# Altium PCB PCB2.PcbDoc (part 2 of 2)
Units mm, origin at the board's own origin, x right, y up, seen from the top; angles counter-clockwise.
Board outline 90.3 x 60.42 mm, 2 copper layers (Layer1, Layer4), stack 0.325 mm thick; 123 components, 111 nets, 492 pads, 352 vias.
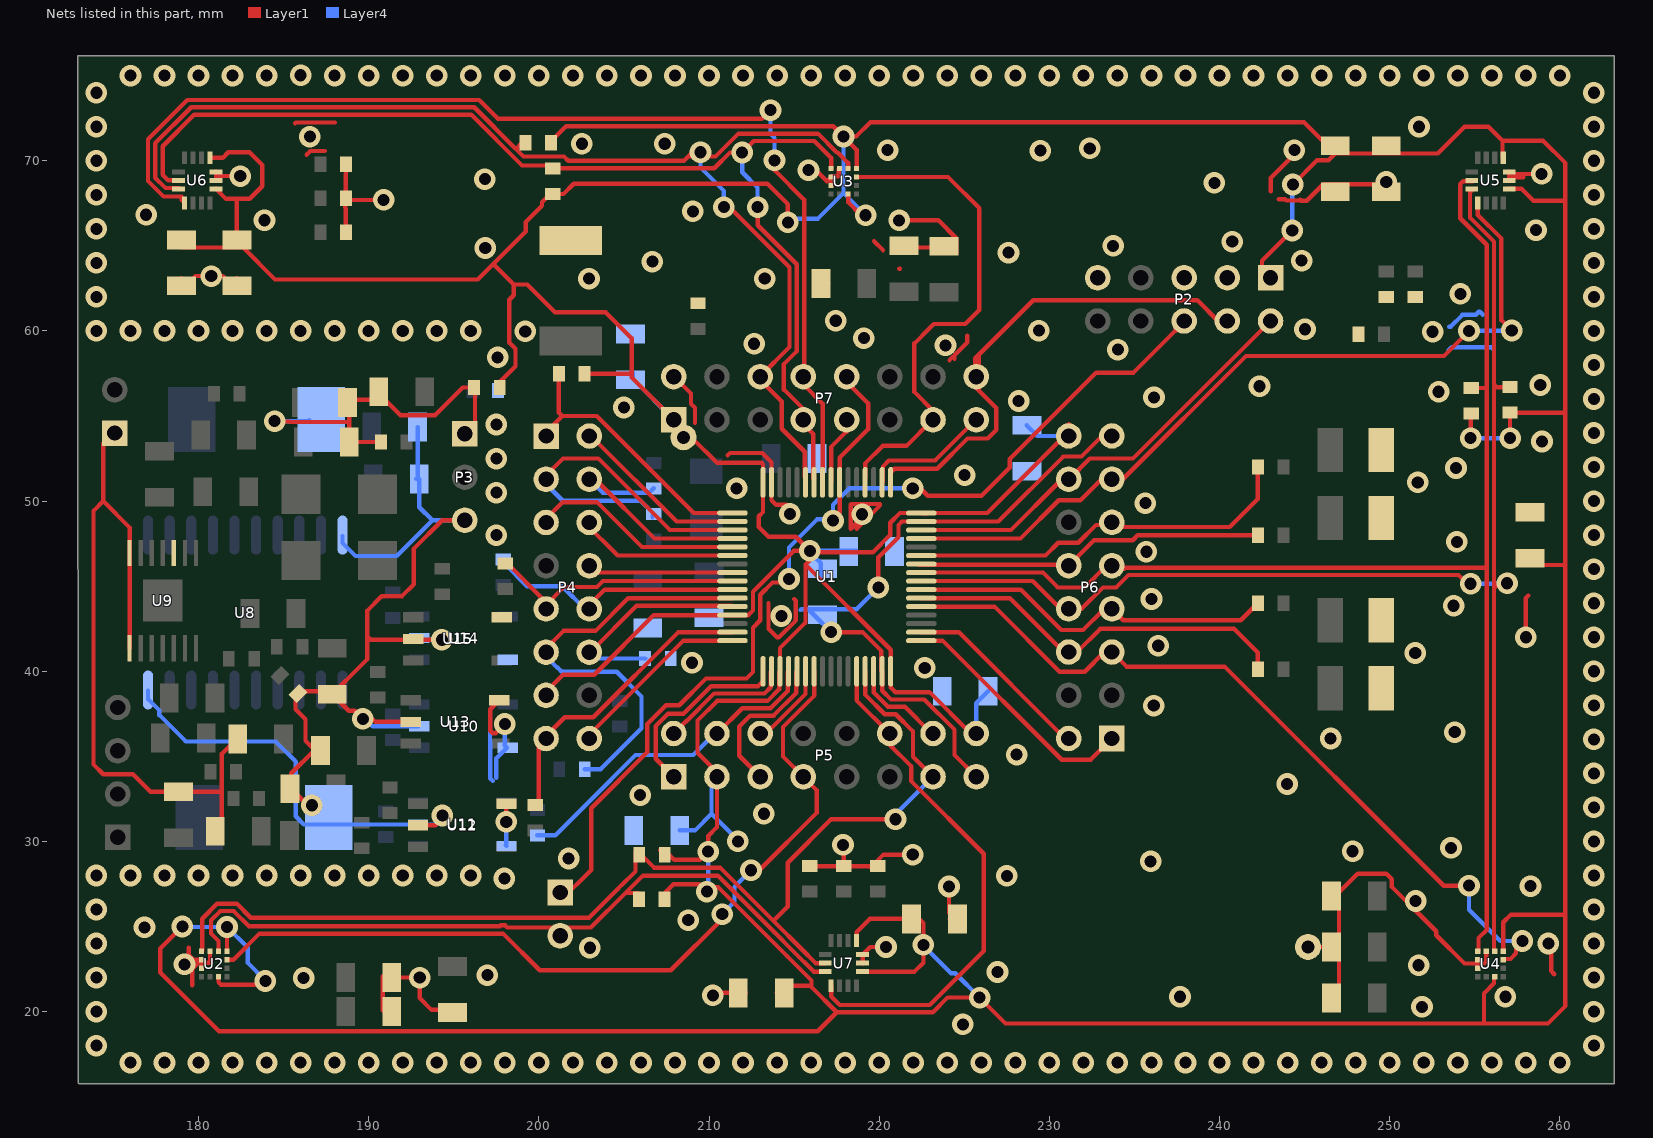
[diagram p2: the nets of this part, all layers, seen from the top]

## Via types
v1: diameter 1.27, hole 0.711, Layer1 to Layer4, 348 vias
v2: diameter 0.5, hole 0.2, Layer1 to Layer4, 4 vias

## Nets (pads, with @x,y where several pads share a name; then routed paths per layer and width w, separated by ;. In a path a pad name is that pad's centre, name@x,y a point inside that pad or via, vN(x,y) a via of type N, cw(c..) or ccw(c..) an arc to the next point about the centre after c; other vN are vias at no path point) (continued)
PA1: P4.15 R37.2 U1.15 | length 23.5
  Layer1 w0.254: U1.15@211.375,42.3 208.2,42.3 203.2,37.3 201.525,37.3 ; P4.15@200.004,35.779 200.004,32.133 P4.15@200.004,35.779 ; P4.15@200.004,35.779 201.525,37.3 ; P4.15@200.004,35.779 201.525,37.3
PA2: P4.16 U1.16 | length 19.2
  Layer1 w0.254: U1.16@211.375,41.8 208.495,41.8 ; 208.495,41.8 202.715,36.02 208.495,41.8
PA3: P5.1 U1.17 | length 11.4
  Layer1 w0.254: P5.1@207.925,33.8 206.87,34.855 206.87,36.777 207.593,37.5 208.5,37.5 210.122,39.122 212.883,39.122 213.171,39.41 213.171,39.996 U1.17@213.175,40
PA4: P5.4 R35.2 U1.20 | length 19.4
  Layer1 w0.254: P5.4@210.465,36.34 211.952,37.827 213.616,37.827 214.63,38.84 214.63,39.955 U1.20@214.675,40
  Layer4 w0.254: R35.2@199.915,30.355 200.964,30.355 202.885,32.276 205.685,35.075 209.075,35.075 210.34,36.34 P5.4@210.465,36.34
PA5: P5.5 U1.21 | length 8.9
  Layer1 w0.254: P5.5@213.005,33.8 211.775,35.03 211.775,36.75 212.42,37.395 213.795,37.395 215.13,38.73 215.13,39.955 U1.21@215.175,40
PA6: P5.6 U1.22 | length 5
  Layer1 w0.254: P5.6@213.005,36.34 213.351,36.34 215.675,38.664 U1.22@215.675,40
PA7: P5.7 U1.23 U2.9 | length 50.6
  Layer1 w0.254: U2.9@181.675,23.05 182.05,23.05 183.582,24.582 197.893,24.582 200.05,22.425 207.75,22.425 210.775,25.45 v1(210.775,25.725) ; v1(212.47,28.305) 212.955,28.305 216.325,31.675 216.325,33.02 P5.7@215.545,33.8 214.35,34.995 214.35,36.729 216.175,38.553 U1.23@216.175,40
  Layer4 w0.254: v1(210.775,25.725) 211.5,26.45 211.5,27.334 v1(212.47,28.305) v1@212.495,28.305
PA8: P6.9 R14.1 U1.41 U4.1 U5.13 | length 82.1
  Layer1 w0.254: U1.41@222.475,45.8 229.625,45.8 230.5,44.925 232.075,44.925 233.36,46.21 P6.9@233.675,46.21 233.675,46.02 234.41,46.02 234.475,46.085 255.615,46.085 255.7,46 ; R14.1@254.8,56.65 255.675,56.65 255.7,56.675 ; U5.13@254.825,68.851 254.87,68.806 254.324,68.806 254.145,68.627 254.145,66.625 255.7,65.07 255.7,56.675 ; U4.1@255.175,23.55 255.22,23.595 255.22,24.32 255.7,24.8 255.7,46 ; 255.7,46 255.7,56.675
PA9: P6.10 R27.2 U1.42 | length 20.9
  Layer1 w0.254: U1.42@222.475,46.3 222.37,46.3 222.325,46.255 231.135,46.255 P6.10@231.135,46.21 232.62,47.695 234.895,47.695 235.2,48 R27.2@242.25,48
PA10: P6.11 R25.2 U1.43 | length 23.3
  Layer1 w0.254: U1.43@222.475,46.8 229.775,46.8 230.525,47.55 231.7,47.55 232.75,48.6 233.525,48.6 P6.11@233.675,48.75 233.95,48.475 240.6,48.475 242.25,50.125 R25.2@242.25,52
PA12: P6.13 U1.45 U5.1 | length 48.1
  Layer1 w0.254: U1.45@222.475,47.8 228.3,47.8 230.55,50.05 231.824,50.05 233.064,51.29 P6.13@233.675,51.29 234.311,51.29 241.553,58.532 253.191,58.532 v1(254.662,60.003) ; U5.1@255.175,67.521 255.175,66.817 256.564,65.428 256.564,60.636 v1(257.175,60.025)
  Layer4 w0.254: v1(254.662,60.003) 257.153,60.003 v1(257.175,60.025)
PA13: P2.2 P6.14 U1.46 | length 25.2
  Layer1 w0.254: U1.46@222.475,48.3 227.738,48.3 230.491,51.053 230.694,50.849 P6.14@231.135,51.29 231.165,51.29 232.375,52.5 234.911,52.5 P2.2@242.61,60.2
PA14: P2.4 P7.16 U1.49 | length 31.8
  Layer1 w0.254: U1.49@220.675,51.797 U1.49@220.675,51.1 220.675,51.675 220.881,51.881 220.881,51.897 223.413,51.897 225.191,53.675 226.375,53.675 226.875,54.175 226.875,55.475 225.65,56.7 225.65,58.4 225.85,58.6 ; 225.85,56.5 225.85,58.6 ; P2.4@239.96,60.31 239.96,60.54 238.7,61.8 229.05,61.8 225.85,58.6
PA15: P7.15 U1.50 | length 7.9
  Layer1 w0.254: U1.50@220.175,51.1 220.22,51.145 220.22,52.038 220.564,52.382 223.287,52.382 225.693,54.788 P7.15@225.915,55.01
PB2: P5.12 U1.28 U7.1 | length 30.7
  Layer1 w0.254: U7.1@217.175,21.521 217.175,20.9 217.684,20.391 222.976,20.391 225.234,22.649 226.15,23.564 226.15,29.273 221.875,33.548 221.875,34.425 220.625,35.675 P5.12@220.625,36.34 218.675,38.29 U1.28@218.675,40
PB3: P2.6 P7.10 U1.55 W1.1 | length 70
  Layer1 w0.254: W1.1@201.75,27.49 201.25,26.99 201.25,26.5 203.075,28.325 203.075,31.95 206.375,35.25 206.375,36.9 207.475,38 208.25,38 209.825,39.575 212.2,39.575 212.58,39.955 212.58,42.561 213.012,42.993 213.012,44.497 213.728,45.213 214.488,45.213 v1(214.7,45.425) v1@214.425,45.425 ; v1(217.286,48.852) 217.286,48.936 217.675,49.325 U1.55@217.675,51.1 217.675,52.55 219.35,54.225 219.35,55.75 218.085,57.015 P7.10@218.085,57.316 218.085,57.34 P7.10@217.585,57.34 ; v1(221.975,50.75) 222.41,50.75 222.85,50.31 226.014,50.31 227.665,51.961 227.665,52.462 232.753,57.55 234.95,57.55 237.42,60.02 P2.6@237.42,60.31
  Layer4 w0.254: v1(214.7,45.425) 214.7,47.275 216.35,48.925 217.213,48.925 v1(217.286,48.852) 217.286,49.786 218.25,50.75 v1(221.975,50.75)
PB4: P7.9 U1.56 | length 4.1
  Layer1 w0.254: U1.56@217.175,51.1 217.175,53.175 218.085,54.085 P7.9@218.085,54.776
PB5: P7.8 U1.57 U6.1 | length 66.4
  Layer1 w0.254: U6.1@179.175,67.521 179,67.696 179,67.896 177.948,67.896 177.03,68.814 177.03,71.264 179.341,73.575 196.5,73.575 197.6,72.475 213.107,72.475 v1(213.61,72.979) ; v1(213.85,70.025) 213.85,69.45 215.589,67.711 215.589,57.359 P7.8@215.545,57.316 215.545,56.855 216.675,55.725 U1.57@216.675,51.35
  Layer4 w0.254: v1(213.61,72.979) 213.61,71.59 213.85,71.35 v1(213.85,70.025)
PB6: P7.7 R10.1 U1.58 U3.1 U6.13 | length 67.3
  Layer1 w0.254: U6.13@178.825,68.851 178.214,68.851 177.893,69.172 177.893,70.858 179.747,72.712 196.022,72.712 199.009,69.725 201.075,69.725 201.24,69.56 210.307,69.56 211.232,70.485 v1(211.95,70.485) 212.63,71.165 216.185,71.165 217.175,70.175 U3.1@217.175,69.55 ; v1(212.86,67.278) 212.86,66.214 215.157,63.917 215.157,58.807 215.05,58.7 214.4,58.05 214.4,56.55 215.545,55.405 P7.7@215.545,54.776 215.545,54.53 216.13,53.945 216.13,51.35 U1.58@216.175,51.35
  Layer4 w0.254: v1(211.95,70.485) 211.95,69.325 212.85,68.425 212.85,67.289 v1(212.86,67.278)
PB7: P7.6 R11.1 U1.59 U3.11 U6.14 | length 73.2
  Layer1 w0.254: U6.14@178.825,68.351 178.87,68.396 178.058,68.396 177.461,68.993 177.461,71.037 179.568,73.143 196.201,73.143 198.645,70.7 198.65,70.7 ; R11.1@199.225,71.05 199,71.05 198.65,70.7 ; v1(209.5,70.5) 209.025,70.5 208.775,70.25 ; v1(210.875,67.275) 211.188,67.275 214.725,63.738 214.725,59.06 213.005,57.34 P7.6@213.005,57.316 213.005,57.12 214.275,55.85 214.275,54.25 215.63,52.895 215.63,51.395 U1.59@215.675,51.35 ; U3.11@218.175,69.55 218.175,69.875 217.565,70.485 217.511,70.485 216.399,71.597 211.732,71.597 210.386,70.25 208.775,70.25 ; 198.65,70.7 199.1,70.25 201.475,70.25 201.725,70 208.525,70 208.775,70.25
  Layer4 w0.254: v1(209.5,70.5) 209.5,69.6 210.875,68.225 v1(210.875,67.275)
PB10: P5.13 R12.1 U1.29 U2.1 U7.13 | length 67.2
  Layer1 w0.254: U2.1@180.175,23.55 180.22,23.595 180.22,25.46 181.107,26.347 182.243,26.347 183.075,25.515 202.95,25.515 204.657,27.221 204.657,27.228 204.835,27.407 204.842,27.407 205.677,28.241 205.677,29.4 R12.1@205.825,29.4 ; R12.1@205.9,29.475 R12.1@205.825,29.4 ; U7.13@216.825,22.851 216.264,22.851 215.453,23.661 213.82,25.295 ; 219,31.3 219,31.302 217.173,31.302 214.625,28.754 214.625,26.179 213.82,25.374 213.82,25.295 ; 219.002,31.302 v1(220.961,31.302) ; U1.29@219.175,40 219.175,38.637 220.332,37.48 220.977,37.48 221.991,36.466 221.991,34.974 P5.13@223.165,33.8 ; R12.1@205.825,29.4 206.765,28.46 210.654,28.46 213.82,25.295
  Layer4 w0.254: v1(220.961,31.302) 220.961,31.596 P5.13@223.165,33.8
PB12: P6.1 U1.33 | length 14.6
  Layer1 w0.254: U1.33@222.475,41.8 223.725,41.8 230.725,34.8 232.425,34.8 P6.1@233.675,36.05
PB13: P6.2 U1.34 | length 11.2
  Layer1 w0.254: U1.34@222.475,42.3 224.675,42.3 230.925,36.05 P6.2@231.135,36.05
PC0: P4.8 U1.8 | length 9.4
  Layer1 w0.254: U1.8@211.375,45.8 P4.8@203.095,45.8 ; P4.8@203.095,45.8 202.715,46.18 P4.8@203.095,45.8
PC1: P4.9 R43.2 U1.9 | length 18
  Layer1 w0.254: R43.2@198.025,46.325 198.15,46.325 P4.9@200.175,44.3 ; U1.9@211.375,45.3 203.764,45.3 203.414,44.95 201.485,44.95 ; P4.9@200.175,43.665 P4.9@200.175,44.3 ; P4.9@200.175,43.665 P4.9@200.175,44.3 ; P4.9@200.175,43.665 200.175,43.64 P4.9@200.188,43.652 ; P4.9@200.188,43.652 P4.9@200.313,43.778 ; P4.9@200.188,43.652 P4.9@200.313,43.778 ; P4.9@200.313,43.778 201.485,44.95 ; P4.9@200.313,43.778 201.485,44.95
PC2: P4.10 R41.2 U1.10 | length 16.7
  Layer1 w0.254: P4.10@202.715,43.665 P4.10@202.715,43.64 ; U1.10@211.375,44.8 203.875,44.8 ; P4.10@202.715,43.64 203.875,44.8 ; P4.10@202.715,43.64 203.875,44.8
  Layer4 w0.254: R41.2@197.9,46.325 197.975,46.325 199.3,45 201.375,45 202.71,43.665 P4.10@202.715,43.665
PC3: P4.11 R39.2 U1.11 | length 28.8
  Layer1 w0.254: P4.11@200.175,41.125 200.175,41.1 P4.11@200.188,41.112 ; U1.11@211.375,44.3 205.25,44.3 203.325,42.375 201.45,42.375 ; P4.11@200.188,41.112 P4.11@200.313,41.238 ; P4.11@200.188,41.112 P4.11@200.313,41.238 ; P4.11@200.313,41.238 201.45,42.375 ; P4.11@200.313,41.238 201.45,42.375
  Layer4 w0.254: R39.2@202.7,34.25 203.639,34.25 206.036,36.646 206.036,38.514 204.575,39.975 201.35,39.975 201.125,40.2 201.1,40.2 ; 201.1,40.2 200.175,41.125 201.1,40.2
PC6: P6.5 U1.37 U4.9 | length 47.2
  Layer1 w0.254: U1.37@222.475,43.8 226.775,43.8 230.6,39.975 232.075,39.975 233.23,41.13 P6.5@233.675,41.13 234.53,40.275 240.3,40.275 253.174,27.401 v1(254.662,27.401) ; U4.9@256.675,23.05 256.72,23.095 257.095,23.095 257.425,23.425 257.425,23.8 257.675,23.8 257.8,23.925 v1(257.8,24.15)
  Layer4 w0.254: v1(254.662,27.401) 254.662,25.988 256.5,24.15 v1(257.8,24.15)
PC7: P6.6 R30.2 U1.38 | length 23.2
  Layer1 w0.254: U1.38@222.475,44.3 227.675,44.3 230.845,41.13 P6.6@231.135,41.13 231.63,41.13 233,42.5 240.855,42.5 242.25,41.105 R30.2@242.25,40.125
PC8: P6.7 R28.2 U1.39 | length 22
  Layer1 w0.254: U1.39@222.475,44.8 228.325,44.8 230.7,42.425 231.986,42.425 233.145,43.584 P6.7@233.145,43.67 ; P6.7@234.04,43.305 P6.7@233.675,43.67 234.345,43 241.25,43 R28.2@242.25,44
PC9: P6.8 R15.1 U1.40 U4.11 U5.14 | length 83.7
  Layer1 w0.254: U1.40@222.475,45.3 229.025,45.3 230.655,43.67 P6.8@231.135,43.67 231.895,43.67 233.15,44.925 233.925,44.925 234.653,45.653 254.047,45.653 254.555,45.145 v1(254.76,45.145) ; U5.14@254.802,68.328 254.899,68.328 254.772,68.201 254.72,68.201 254.72,66.661 256.132,65.249 256.132,56.854 256.184,56.801 256.184,56.7 ; U4.11@256.175,23.55 256.132,23.593 256.132,44.925 ; v1(256.9,45.175) 256.432,45.175 256.182,44.925 256.132,44.925 ; R15.1@257.075,56.7 256.157,56.7 256.132,56.725 256.132,44.925
  Layer4 w0.254: v1(254.76,45.145) 254.765,45.15 256.7,45.15 v1@256.9,44.95
PC11: P7.13 U1.52 U3.9 | length 29.4
  Layer1 w0.254: U3.9@218.675,69.05 224.046,69.05 225.879,67.217 225.879,61.235 225.056,60.411 223.211,60.411 222.947,60.147 222.068,59.268 222.068,56.407 223.165,55.31 223.165,54.8 223.153,54.788 221.61,53.245 220.206,53.245 219.175,52.214 U1.52@219.175,51.35
PC13: P4.2 U1.2 | length 11.1
  Layer1 w0.254: U1.2@211.375,48.8 208.1,48.8 P4.2@203.1,53.8 ; P4.2@203.1,53.8 202.715,53.8 P4.2@203.1,53.8
PC14: P4.3 R29.2 U1.3 | length 21
  Layer1 w0.254: P4.3@200.175,51.26 200.188,51.272 200.313,51.398 201.415,52.5 203.5,52.5 207.7,48.3 U1.3@211.375,48.3
  Layer4 w0.254: P4.3@200.175,51.26 201.41,50.025 205.975,50.025 206.675,49.325 R29.2@206.675,49.05
PC15: P4.4 R31.1 U1.4 | length 14.6
  Layer1 w0.254: P4.4@202.715,51.26 203.34,51.26 206.8,47.8 U1.4@211.375,47.8
  Layer4 w0.254: P4.4@202.715,51.26 P4.4@202.991,51.26 ; P4.4@202.966,51.285 P4.4@202.991,51.26 ; R31.1@206.75,50.75 206.5,50.5 203.751,50.5 P4.4@202.991,51.26
PH0: P4.5 U1.5 | length 14.5
  Layer1 w0.254: P4.5@200.175,48.72 P4.5@200.188,48.732 ; U1.5@211.375,47.3 206.064,47.3 203.439,49.925 201.38,49.925 ; P4.5@200.188,48.732 P4.5@200.313,48.858 ; P4.5@200.188,48.732 P4.5@200.313,48.858 ; P4.5@200.313,48.858 201.38,49.925 ; P4.5@200.313,48.858 201.38,49.925
PH1: P4.6 U1.6 | length 12.2
  Layer1 w0.254: U1.6@211.375,46.8 204.635,46.8 ; 204.635,46.8 202.715,48.72 204.635,46.8
SDA2: R13.1 U2.11 U7.14 W1.2 | length 43.1
  Layer1 w0.254: U2.11@181.175,23.55 181.175,24.146 180.735,24.586 180.735,25.364 181.286,25.915 182.064,25.915 182.965,25.014 197.714,25.014 197.767,25.067 198.019,25.067 198.145,24.941 203.054,24.941 205.089,26.975 205.1,26.975 ; R13.1@205.875,26.975 205.1,26.975 ; U7.14@216.825,22.351 216.153,22.351 216.137,22.366 214.969,23.535 213.832,24.672 210.513,27.991 206.116,27.991 205.1,26.975
SEQ: U9.10
VBAT: P4.1 RBat.1 U1.1 | length 18.3
  Layer1 w0.254: RBat.1@201.175,57.475 201.175,55.2 201.375,55 ; U1.1@211.375,49.3 209.1,49.3 203.4,55 201.375,55 ; 201.375,55 200.175,53.8 201.375,55
VCAP1: P5.14 U1.30 | length 5.8
  Layer1 w0.254: U1.30@219.675,40 219.675,38.748 220.511,37.911 221.516,37.911 222.991,36.436 223.03,36.475 P5.14@223.165,36.34
VDD: C10.2 C11.2 C12.2 C13.2 C14.2 C15.2 C16.2 C17.2 C18.2 C40.2 C41.2 C42.2 C43.2 P2.1 P4.13 P5.3 P5.16 P6.16 P7.1 pad.3 R3.3V.2 R10.2 R11.2 R12.2 R13.2 R14.2 R15.2 RBat.2 U1.13 U1.19 U1.32 U1.48 U1.64 U2.6 U2.10 U3.6 U3.10 U4.6 U4.10 U5.5 U5.8 U6.5 U6.8 U7.5 U7.8 | length 485.8
  Layer1 w0.254: C14.2@179,64.9 C11.2@182.25,64.9 ; v1(179.05,25) 177.75,23.7 177.75,22.3 181.205,18.845 216.392,18.845 217.506,19.959 ; U6.8@180.675,70.181 181.431,70.181 181.75,70.5 183,70.5 183.75,69.75 183.75,68.5 183.013,67.763 182.25,67.763 ; U6.5@181.025,68.351 181.614,67.762 182.25,67.762 C11.2@182.25,64.9 ; U2.6@181.175,22.05 181.175,21.725 181.325,21.575 183.7,21.575 v1(183.925,21.8) ; U2.10@181.675,23.55 v1(181.675,24.975) ; R3.3V.2@197.741,56.484 197.741,57.041 198.625,57.925 198.625,58.95 198.26,59.315 198.26,61.835 198.525,62.1 198.525,62.732 ; 198.029,63.225 198.522,62.732 198.525,62.732 ; 198.39,62.865 197.329,63.925 197.311,63.925 197.277,63.891 ; P4.13@200.175,38.56 200.188,38.572 200.313,38.698 201.415,39.8 203.25,39.8 206.75,43.3 U1.13@211.375,43.3 212.3,43.3 212.58,43.58 212.58,44.676 214.979,47.075 v1(215.925,47.075) ; R11.2@200.675,71.1 201.603,72.028 217.297,72.028 v1(217.9,71.425) ; RBat.2@202.675,57.475 205.336,57.475 205.461,57.6 ; R12.2@207.131,29.475 207.4,29.475 207.95,28.925 209.475,28.925 v1(209.95,29.4) 209.95,30.325 210.465,30.84 P5.3@210.465,33.8 210.175,34.09 210.175,34.365 209.325,35.215 209.325,37.104 210.48,38.258 213.437,38.258 214.13,38.951 214.13,39.955 U1.19@214.175,40 214.175,41.361 215.675,42.86 215.675,46.27 ; R13.2@207.4,26.975 207.9,27.475 209.454,27.475 v1(209.877,27.051) 210.126,27.3 210.55,27.3 213.61,24.24 214.59,23.26 216.025,21.825 216.025,21.525 ; P7.1@207.925,54.8 205.461,57.264 205.461,57.6 ; pad.3@208.5,53.75 209.038,53.685 210.469,52.255 213.091,52.255 213.175,52.171 U1.64@213.175,51.1 213.175,49.365 212.925,49.115 212.925,48.475 213.5,47.9 215.1,47.9 v1(215.925,47.075) ; C15.2@213.975,21.1 214.4,21.525 216.025,21.525 ; v1(214.635,66.378) 214.635,67.443 213.429,68.65 202.045,68.65 201.445,68.05 R10.2@200.825,68.05 200.675,68.05 200.187,67.562 200.187,67.359 199.225,66.398 199.225,65.839 197.5,64.114 197.277,63.891 ; U3.6@218.175,68.05 218.175,67.57 218.945,66.8 v1(219.2,66.8) ; U7.8@218.675,24.181 218.675,24.675 218.825,24.825 219.45,25.45 222.35,25.45 222.6,25.2 v1(222.6,23.925) 222.601,22.877 222.076,22.351 U7.5@219.025,22.351 ; U3.10@218.675,69.55 218.675,70.65 v1(217.9,71.425) ; P5.16@225.705,35.92 P5.16@225.705,36.34 225.385,36.34 222.95,38.775 220.95,38.775 220.675,39.05 U1.32@220.675,40 220.675,41.27 215.675,46.27 ; P6.16@231.135,54.535 P6.16@231.135,53.83 230.88,53.83 226.35,49.3 222.85,49.3 222.827,49.277 222.498,49.277 U1.48@222.475,49.3 221.223,49.3 220.647,48.725 220.647,48.003 220.643,48.007 219.629,46.993 216.007,46.993 v1(215.925,47.075) ; P2.1@242.5,62.85 242.5,64.125 v1(244.275,65.9) ; v1(244.312,68.603) 245.734,70.025 246.4,70.025 C13.2@246.8,70.425 ; v1(254.754,53.703) 254.754,55.104 R14.2@254.8,55.15 ; U4.6@256.175,22.05 256.13,22.005 256.13,21.663 255.539,21.072 255.539,19.3 ; U4.10@256.675,23.55 256.675,25.25 257.125,25.7 260.325,25.7 ; U5.8@256.675,70.181 256.63,70.226 256.63,71.175 ; U5.5@257.025,68.351 257.749,68.351 258.45,67.65 260.325,67.65 ; v1(257.08,53.703) 257.075,53.707 R15.2@257.075,55.2 260.3,55.2 260.325,55.175 ; C18.2@258.15,46.25 260.3,46.25 260.325,46.275 ; C11.2@182.25,64.9 182.625,64.9 184.5,63.025 196.411,63.025 197.277,63.891 ; 198.525,62.732 199.318,62.732 200.95,61.1 203.925,61.1 205.461,59.564 205.461,57.6 ; 215.675,46.27 215.925,46.52 v1(215.925,47.075) ; 216.025,21.525 216.025,21.439 217.506,19.959 ; 217.506,19.959 223.155,19.959 224.021,20.825 v1(225.9,20.825) 227.425,19.3 255.539,19.3 ; v1(217.9,71.425) 218.646,71.425 219.486,72.265 244.96,72.265 C13.2@246.8,70.425 ; C13.2@246.8,70.425 252.825,70.425 254.4,72 255.805,72 256.63,71.175 ; 255.539,19.3 259.3,19.3 260.325,20.325 260.325,25.7 ; 256.63,71.175 259.015,71.175 260.325,69.864 260.325,67.65 ; 260.325,25.7 260.325,46.275 ; 260.325,46.275 260.325,55.175 ; 260.325,55.175 260.325,67.65
  Layer4 w0.254: v1@179.1,24.975 v1(181.675,24.975) 182.9,23.75 182.9,22.86 183.925,21.835 v1(183.925,21.8) ; C43.2@205.525,57.55 205.525,57.176 P7.1@207.925,54.776 ; C42.2@208.275,30.65 209.175,30.65 210.15,31.625 ; v1(209.877,27.051) 209.95,27.124 v1(209.95,29.4) ; P5.3@210.465,33.8 210.15,33.485 210.15,31.625 ; v1(211.7,30) 211.7,30.075 210.15,31.625 ; v1(214.635,66.378) 214.857,66.6 216.4,66.6 217.9,68.1 ; C16.2@216.575,45.575 216.575,46.35 215.925,47 v1(215.925,47.075) C17.2@218.65,47.075 ; v1(217.9,71.425) 217.9,68.1 ; v1(219.2,66.8) 217.9,68.1 ; v1@222.575,23.9 224.225,22.25 224.475,22.25 v1(225.9,20.825) ; P5.16@225.705,36.34 225.705,38.13 C40.2@226.4,38.825 ; C41.2@228.675,54.45 229.295,53.83 P6.16@231.135,53.83 ; v1(244.275,65.9) 244.275,68.566 v1(244.312,68.603) ; v1(254.754,53.703) v1(257.08,53.703)
VIN: C19.1 C20.2 C21.2 P8.1 U9.1 U9.14 | length 44.2
  Layer1 w0.254: P8.1@175.075,54 175.012,53.995 174.4,53.384 174.4,50 ; U9.1@175.95,41.35 U9.14@175.95,46.95 175.95,48.45 174.4,50 ; C21.2@181.375,30.925 181.375,32.925 ; 174.4,50 173.825,49.425 173.825,34.525 174.4,33.95 176.15,33.95 177.175,32.925 C20.2@178.825,32.925 181.375,32.925 ; 181.375,32.925 181.375,35.15 ; 181.375,35.15 182.225,36 181.375,35.15
VOUT3V: C25.1 C28.2 C29.2 L2.2 P3.1 R3.3V.1 R19.1 | length 22.1
  Layer1 w0.254: v1@184.475,54.675 185.344,54.675 185.374,54.645 188.795,54.645 188.85,54.7 ; R19.1@190.725,53.475 188.854,53.475 C29.2@188.85,53.471 188.85,54.7 ; P3.1@195.65,53.95 196.25,54.55 R3.3V.1@196.25,56.625 ; R3.3V.1@196.2,56.675 195.525,56.675 193.9,55.05 191.875,55.05 190.975,55.95 188.9,55.95 188.85,55.9 188.85,54.7
  Layer4 w0.254: v1(184.475,54.7) 186.46,54.7 L2.2@186.51,54.75
VOUT5V: C24.1 C26.2 C27.2 C35.2 C36.2 L1.2 P3.3 R18.1 U8.10 U8.20 U10.5 U11.5 U12.5 U13.5 U14.5 U15.5 | length 81.4
  Layer1 w0.254: C26.2@185.415,33.135 185.325,33.225 185.325,33.146 C26.2@185.375,33.096 C26.2@185.454,33.096 ; v1(186.659,32.127) 186.423,32.127 C26.2@185.454,33.096 ; U13.5@192.475,37.025 190.404,37.025 189.825,37.604 189.659,37.438 v1(189.659,37.202) 189.186,37.675 188.833,37.675 C27.2@187.858,38.65 ; U12.5@192.9,30.95 193.925,30.95 194.334,31.36 v1(194.334,31.527) ; v1(194.3,41.85) 190.125,41.85 189.925,42.05 ; P3.3@195.65,48.87 194.32,48.87 192.657,47.207 192.657,45.119 191.955,44.418 190.768,44.418 189.925,43.575 189.925,42.05 ; C26.2@185.454,33.096 185.454,34.004 186.8,35.35 C24.1@187.175,35.35 186.85,35.35 186.287,35.913 186.287,37.18 185.7,37.767 185.7,38.825 187.683,38.825 C27.2@187.858,38.65 ; C27.2@187.858,38.65 189.55,40.342 189.552,40.342 189.925,40.714 189.925,42.05
  Layer4 w0.254: U8.10@177.035,38.85 177.035,38.365 177.7,37.7 177.7,37.425 179.257,35.868 184.532,35.868 185.71,34.69 185.71,31.475 186.185,31 U11.5@192.9,31 193.875,31 194.334,31.459 v1(194.334,31.527) ; U8.20@188.465,47.95 188.465,47.535 189.225,46.775 191.65,46.775 193.745,48.87 ; v1(189.659,37.202) 189.806,37.202 190.232,36.775 U10.5@192.925,36.775 ; C35.2@192.875,54.35 192.875,51.38 192.795,51.3 C36.2@192.975,51.3 192.975,49.64 193.745,48.87 ; U14.5@192.9,41.95 193,41.85 v1(194.3,41.85) ; P3.3@195.65,48.87 193.745,48.87
VSS: B1.1 C1.1 C2.1 C3.1 C4.1 C5.1 C6.1 C7.1 C8.1 C9.1 C10.1 C11.1 C12.1 C13.1 C14.1 C15.1 C16.1 C17.1 C18.1 C37.2 C38.1 C39.2 C40.1 C41.1 C42.1 C43.1 D3.2 D4.2 D5.2 D6.2 P2.3 P2.5 P2.9 P5.2 P5.15 P6.15 P7.2 pad.2 R1.2 R2.2 R3.2 R4.2 R5.2 R6.2 R7.1 R8.1 R9.1 R24.2 R26.1 R32.2 U1.18 U1.31 U1.47 U1.63 U2.2 U2.3 U2.12 U3.2 U3.3 U3.12 U4.2 U4.3 U4.12 U5.6 U5.7 U6.6 U6.7 U7.6 U7.7 U10.3 U11.3 U12.3 U13.3 U14.3 U15.3 | length 182.4
  Layer1 w0.254: C14.1@179,63.1 179.35,62.75 179.825,63.225 v1(180.75,63.225) 181.425,63.225 181.9,62.75 C11.1@182.25,63.1 ; 179.432,23.757 179.432,23.314 179.695,23.05 U2.2@180.175,23.05 ; 179.639,21.55 179.639,22.514 U2.2@180.175,23.05 ; U2.3@180.175,22.55 180.175,22.7 180.35,22.875 ; U2.12@180.675,23.55 180.675,22.875 180.35,22.875 ; U6.7@181.025,69.351 181.025,69.05 181.075,69.1 v1(182.45,69.1) ; 185.675,72.2 185.725,72.25 188.025,72.25 ; 186.35,70.35 186.575,70.575 187.425,70.575 ; R4.2@188.675,65.8 R8.1@188.629,67.698 ; R3.2@188.675,69.8 R8.1@188.629,67.698 ; v1(190.879,67.698) R8.1@188.629,67.698 ; C5.1@190.916,19.984 190.931,20 190.9,20 190.825,20.075 190.825,22.075 190.9,22 v1(193,22) 193,20.8 193.7,20.1 C1.1@194.925,20.1 ; U13.3@197.675,38.295 197.15,37.77 197.15,36.51 197.3,36.36 197.46,36.36 v1(198,36.9) ; v1(198.085,31.152) 198.085,32.135 198.05,32.17 U12.3@198.1,32.22 ; P5.2@207.925,36.34 207.925,36.342 208.651,37.068 208.679,37.068 210.301,38.69 213.258,38.69 213.63,39.062 213.63,39.955 U1.18@213.675,40 U1.18@213.65,40.025 ; P7.2@207.925,57.34 208.943,56.322 208.943,55.713 209.175,55.481 209.175,54.598 ; v1(210.223,20.95) 210.223,21.469 210.225,21.47 210.484,21.211 210.595,21.1 C15.1@212.175,21.1 ; 211.087,52.686 211.23,52.83 213.127,52.83 213.675,52.282 U1.63@213.675,51.35 ; 213.5,44 213.5,42.5 214,42 214.115,42 215.104,42.989 215.104,44.146 215,44.25 ; U1.63@213.675,51.1 213.675,50.05 213.948,49.777 214.552,49.777 214.75,49.579 v1(214.75,49.25) ; v1(215.846,69.45) 216.275,69.45 216.925,68.8 U3.2@217.175,69.05 ; R5.2@215.925,28.55 R9.1@217.925,28.55 ; C6.1@216.753,62.8 C6.1@217.025,62.8 ; v1(217.175,42.3) 219.017,42.3 220.13,41.187 220.13,40.045 U1.31@220.175,40 220.175,38.858 220.69,38.343 222.654,38.343 224.425,36.572 224.425,35.08 P5.15@225.705,33.8 ; U3.3@217.175,68.55 U3.2@217.175,69.05 ; U3.12@217.675,69.55 217.63,69.505 217.63,69.095 217.22,69.095 U3.2@217.175,69.05 ; v1(217.875,29.8) 217.925,29.75 R9.1@217.925,28.55 ; 218.675,48.375 220.05,49.75 220.05,49.825 218.35,49.825 218.325,49.8 218.325,48.375 219,49.05 v1(219,49.225) ; U7.6@219.025,22.851 U7.7@219.025,23.351 219.474,23.8 v1(220.4,23.8) 220.4,23.425 v1@220.425,23.4 ; R6.2@219.5,28.475 R6.2@219.575,28.55 ; 219.7,65.275 220.225,64.75 ; R6.2@219.925,28.55 R6.2@219.575,28.55 ; v1(219.95,44.925) 219.95,46.695 221.132,47.876 221.132,48.599 221.333,48.8 U1.47@222.475,48.8 227,48.8 230.825,52.625 231.889,52.625 233.094,53.83 P6.15@233.675,53.83 ; 221.175,63.65 221.225,63.65 ; v1(221.175,66.5) 223.48,66.5 224.531,65.449 224.531,64.575 223.8,64.9 C4.1@221.8,64.9 ; v1(221.975,29.225) 220.25,29.225 R6.2@219.575,28.55 ; v1(224.1,27.35) 224.1,25.8 224.3,25.6 C12.1@224.15,25.45 ; 224.132,58.284 224.321,58.473 ; 224.421,58.373 224.421,58.573 225.175,59.327 225.175,59.725 ; 243.01,68.211 243.01,68.989 244.4,70.379 v1(244.4,70.625) ; 243.483,67.737 243.849,67.737 243.923,67.664 244.701,67.664 244.74,67.702 244.792,67.65 245.125,67.65 246.1,68.625 C10.1@249.769,68.625 ; pad.2@245.2,23.8 C8.1@247.025,23.8 ; C7.1@247.025,20.8 247.025,27.01 248.115,28.1 249.806,28.1 250.13,27.776 250.13,27.326 252.735,24.721 252.735,24.486 254.396,22.825 255.175,22.825 ; U4.3@255.175,22.55 255.175,22.825 ; U4.12@255.675,23.55 255.675,22.925 255.575,22.825 255.175,22.825 ; U5.7@257.025,69.351 U5.6@257.025,68.851 257.199,69.025 ; 257.85,69.025 257.199,69.025 ; v1(258,42) 258,44.3 258.15,44.45 ; v1(258.927,69.227) 257.401,69.227 257.199,69.025 ; v1(259.325,24) 259.49,23.835 259.49,22.385 259.675,22.2 ; U2.2@180.175,23.05 180.35,22.875 ; R9.1@217.925,28.55 R6.2@219.575,28.55 ; C10.1@249.769,68.625 249.8,68.625 249.775,68.65 249.775,68.631 C10.1@249.769,68.625
  Layer4 w0.254: 197.125,37.675 197.125,35.85 197.15,35.825 197.15,33.7 197.3,33.55 ; 197.5,33.75 197.5,34.88 198.125,35.505 198,35.63 v1(198,36.9) ; v1(198.085,31.152) 198.085,29.815 198.05,29.78 U11.3@198.1,29.73 ; 215.375,43.6 215.425,43.65 C16.1@215.825,43.65 ; v1(217.175,42.3) 216.188,43.287 C16.1@215.825,43.65 ; v1(219.95,44.925) 218.675,43.65 C16.1@215.825,43.65 ; 253.475,58.875 253.64,59.04 255.96,59.04 256.05,58.95 ; 253.5,60.25 253.58,60.25 254.273,60.943 255.052,60.943 255.234,61.125 255.3,61.125 255.475,60.95
  other v1: 176,17 178,17 180,17 182,17 184,17 186,17 188,17 190,17 192,17 194,17 196,17 198,17 200,17 202,17 204,17 206,17 208,17 210,17 212,17 214,17 216,17 218,17 220,17 222,17 224,17 226,17 228,17 230,17 232,17 234,17 236,17 238,17 240,17 242,17 244,17 246,17 248,17 250,17 252,17 254,17 256,17 258,17 260,17 174,18 262,18 224.92,19.252 174,20 262,20 251.9,20.275 237.675,20.875 256.8,20.875 186.175,21.975 174,22 262,22 196.977,22.148 226.95,22.325 251.7,22.725 179.175,22.775 203,23.75 174,24 262,24 176.825,24.95 208.777,25.373 174,26 262,26 251.525,26.5 258.275,27.375 197.975,27.825 227.5,27.975 174,28 176,28 178,28 180,28 182,28 184,28 186,28 188,28 190,28 192,28 194,28 196,28 262,28 235.95,28.825 201.75,29 247.825,29.425 253.6,29.625 262,30 213.225,31.625 262,32 205.95,32.725 243.973,33.373 262,34 228.075,35.1 262,36 246.527,36.052 253.825,36.425 236.134,37.978 262,38 262,40 222.675,40.2 209,40.5 251.5,41.075 236.4,41.5 262,42 214.25,43.25 253.755,43.848 262,44 236,44.25 262,46 235.7,47.025 253.946,47.604 197.5,48 262,48 235.643,49.884 262,50 197.5,50.5 211.623,50.752 251.65,51.1 225.023,51.527 253.898,51.948 262,52 197.5,52.5 258.948,53.502 262,54 197.5,54.5 205,55.5 228.193,55.884 262,56 236.152,56.098 252.875,56.425 242.35,56.75 258.85,56.825 262,58 197.575,58.45 234.025,58.9 223.9,59.15 212.65,59.25 219.1,59.575 252.523,59.952 199.2,59.975 174,60 176,60 178,60 180,60 182,60 184,60 186,60 188,60 190,60 192,60 194,60 196,60 262,60 229.382,60.016 245.025,60.1 217.45,60.6 174,62 262,62 254.15,62.175 202.95,63.075 213.273,63.073 174,64 262,64 206.675,64.075 244.829,64.129 227.6,64.6 196.85,64.875 233.75,65 240.75,65.25 258.598,65.927 174,66 262,66 183.877,66.502 176.925,66.825 209.05,67.025 174,68 262,68 239.7,68.7 249.8,68.752 196.825,68.925 174,70 262,70 229.473,70.598 220.5,70.625 232.377,70.727 202.525,71 207.4,71 186.545,71.423 174,72 251.725,72 262,72 174,74 262,74 176,75 178,75 180,75 182,75 184,75 188,75 190,75 192,75 194,75 196,75 198,75 200,75 202,75 204,75 206,75 208,75 210,75 212,75 214,75 216,75 218,75 220,75 222,75 224,75 226,75 228,75 230,75 232,75 234,75 236,75 238,75 240,75 242,75 244,75 246,75 248,75 250,75 252,75 254,75 256,75 258,75 260,75 186,75.025
VSSA: P4.12 R32.1 U1.12 | length 13.3
  Layer1 w0.254: P4.12@202.715,41.1 203,41.1 205.745,43.845 211.33,43.845 U1.12@211.375,43.8
  Layer4 w0.254: P4.12@202.966,41.125 203.341,40.75 R32.1@206.25,40.75
pads on no net: P2.7 P2.8 U5.2 U5.3 U6.2 U6.3 U7.2 U7.3 U10.6 U11.6 U12.6 U13.6 U14.6 U15.6

## Polygon pours and split planes (outlines as drawn)
AGND on Layer4 "Layer4-AGND" (solid, pour order 66): 174.5,37.275 174.675,37.15 174.8,37.05 174.95,36.975 175.025,36.975 175.05,36.95 175.25,36.925 175.45,36.95 175.55,37 175.975,37 175.975,36.2 175.95,36.175 175.9,36.125 175.825,36.125 175.675,36.175 175.55,36.225 175.525,36.25 175.225,36.25 174.925,36.2 174.825,36.15 174.675,36.075 174.6,36 174.5,35.95
AGND on Layer4 "Layer4-AGND" (solid, remove dead copper, pour order 64): 172.925,59.1 196.5,59.1 196.5,28.95 172.925,28.95
VSS on Layer4 "Layer2-GND" (solid, remove dead copper, pour order 56): 172.925,76.15 263.2,76.15 263.2,15.8 172.925,15.8 172.925,28.475 196.975,28.475 196.975,59.425 172.925,59.425
AGND on Layer1 "Layer1-AGND" (solid, remove dead copper, pour order 62): 172.925,59.125 196.5,59.125 196.5,28.95 172.95,28.95
VSS on Layer1 "Layer1-VDD" (solid, pour order 54): 172.925,76.15 263.2,76.15 263.2,15.8 172.925,15.8 172.925,28.475 196.975,28.475 196.975,59.425 172.925,59.425

## Silkscreen, mask and mechanical layers (free items; w line width, h text height)
Top Overlay:
  text "GND" at 232.65,66.275 h1.52 r90
  text "VDD" at 243.379,65.866 h1.52 r90
  text "J2" at 243.2,64.9 h1.52
  text "Serial Wire Debug" at 231.85,64.775 h1.52
  text "RST" at 229.5,57.125 h1.52
  text "SWDIO" at 242.223,56.623 h1.52
  text "SWCLK" at 240.675,51.525 h1.52 r90
  text "J1" at 197.575,24.675 h1.52
  text "J1" at 200.35,24.1 h1.52
  text "v0.0 - Nov/2018" at 237.175,17.95 h1.52
Bottom Overlay:
  drawing of 45 lines, arcs and shapes, not listed
  text "GND" at 177.5,58.25 h1.52
  text "+12V" at 178.75,50.75 h1.52
  text "3" at 174.25,37 h1.52
  text "4" at 174.25,34.5 h1.52
  text "2" at 174.225,32 h1.52
  text "1" at 173.75,29.5 h1.52

## Text inside footprints (layer, text, board x,y; h text height)
P2: Top Overlay "2" at 244.8,59.875 h1.27; Top Overlay "1" at 245.1,63.15 h1.27; Top Overlay "9" at 230.05,62.525 h1.27; Top Overlay "10" at 229.175,59.35 h1.27
P4: Top Overlay "2" at 202.458,56.365 h0.75 r270; Top Overlay "1" at 199.918,56.365 h0.75 r270; Top Overlay "15" at 199.918,34.521 h0.75 r270; Top Overlay "16" at 202.458,34.521 h0.75 r270
P5: Top Overlay "16" at 227.229,35.832 h0.75; Top Overlay "15" at 227.229,33.292 h0.75; Top Overlay "1" at 205.385,33.292 h0.75; Top Overlay "2" at 205.385,35.832 h0.75
P6: Top Overlay "16" at 231.643,55.354 h0.75 r90; Top Overlay "15" at 234.183,55.354 h0.75 r90; Top Overlay "1" at 234.183,33.51 h0.75 r90; Top Overlay "2" at 231.643,33.51 h0.75 r90
P7: Top Overlay "16" at 227.575,57.1 h0.75; Top Overlay "15" at 227.425,54.2 h0.75; Top Overlay "1" at 205.385,54.268 h0.75; Top Overlay "2" at 205.4,57.175 h0.75